# Altium PCB dc_mini_fan_controller.PcbDoc
Units mm, origin at the board's own origin, x right, y up, seen from the top; angles counter-clockwise.
Board outline 17.5 x 17.5 mm, 2 copper layers (Top Layer, Bottom Layer); 11 components, 7 nets, 37 pads, 6 vias.
Unrouted connection lines stored in the file: 1.
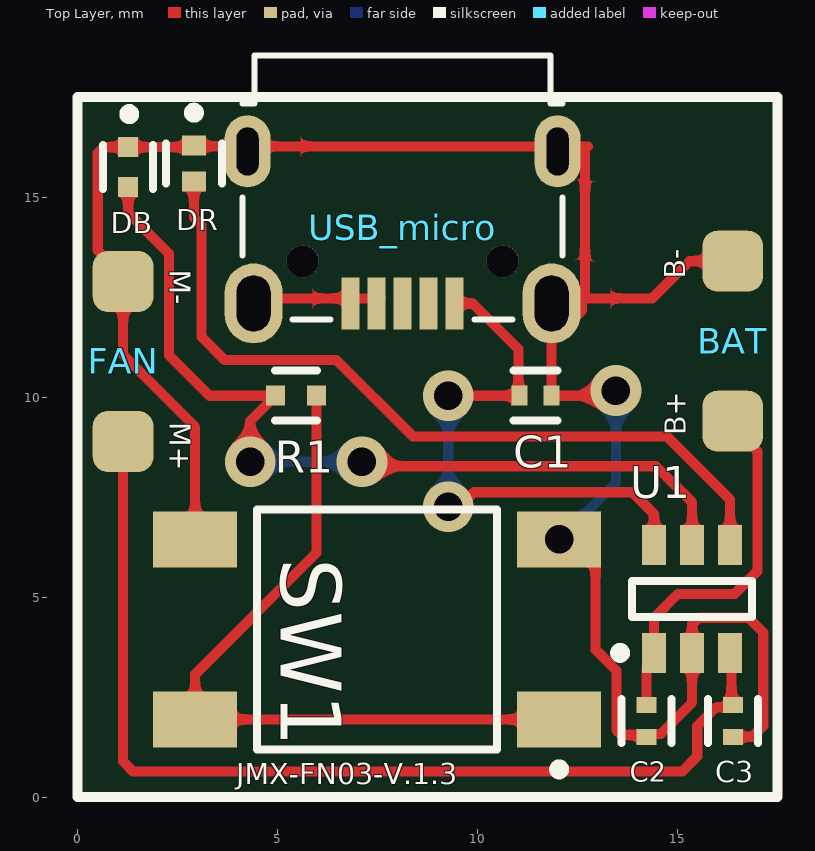
[diagram p0: Top Layer view]
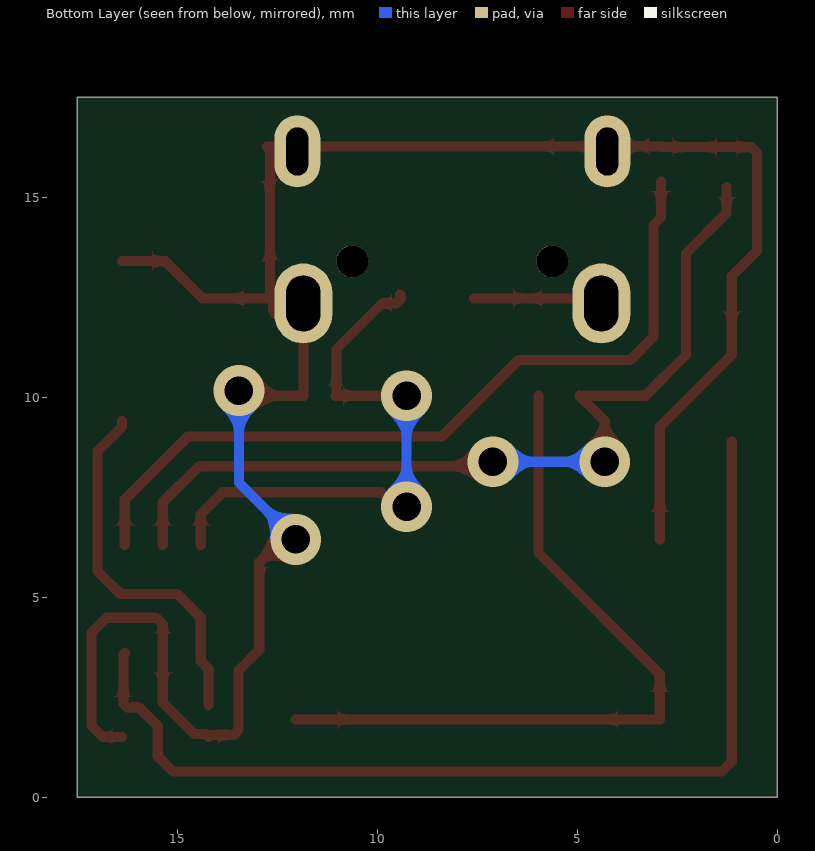
[diagram p1: Bottom Layer view, seen from below]
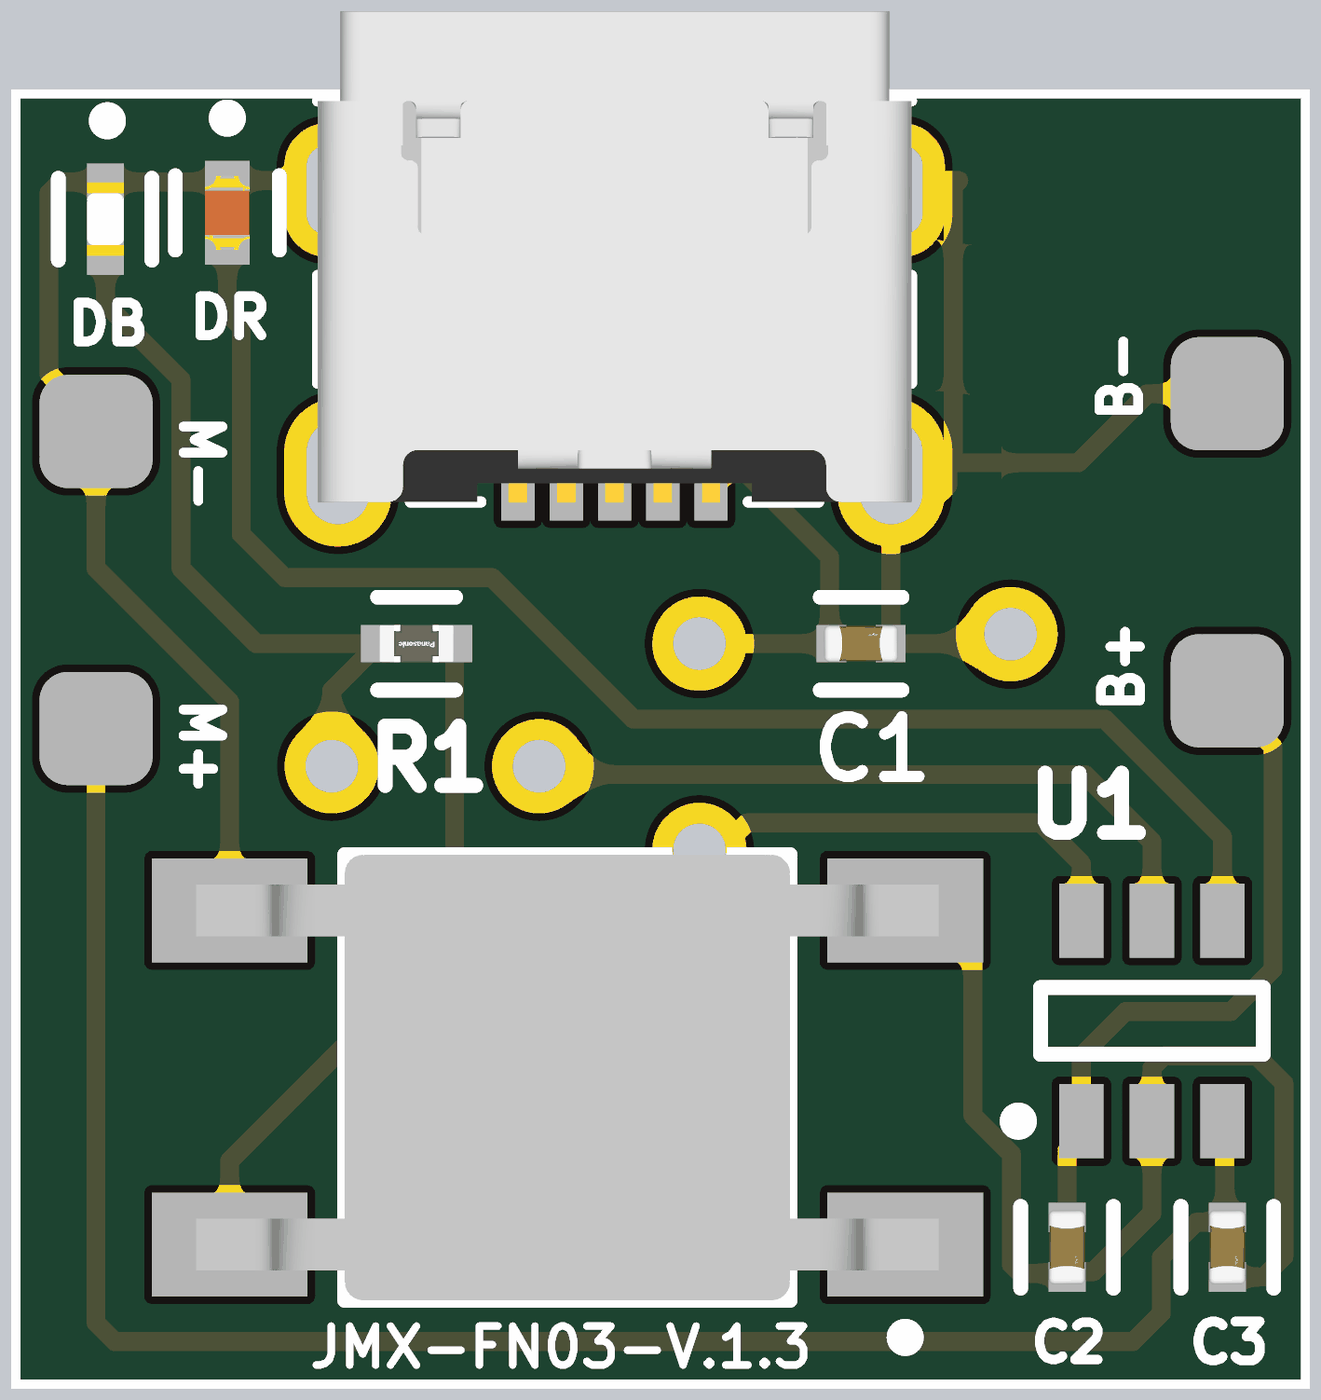
[diagram p2: 3D render of the assembled board from above, using the file's embedded part models]

## Layer stack, top to bottom
Top Solder: solder mask 0.0102, Solder Resist, Dk 3.5
Top Layer: signal copper 0.0356
Dielectric 1: dielectric 0.32, FR-4, Dk 4.8
Bottom Layer: signal copper 0.0356
Bottom Solder: solder mask 0.0102, Solder Resist, Dk 3.5

## Board outline
0,0 17.5,0 17.5,17.5 0,17.5

## Design rules (kind name [scope] priority, off if disabled: settings)
Clearance [All] p1: gap=0.254 ignorepadtopadclearanceinfootprint=FALSE except(0: Arc-Hole Track-Hole SMDPad-Hole THPad-Hole Via-Hole Fill-Hole Poly-Hole Region-Hole Text-Hole)
PolygonConnect [All] p1: connectstyle=Relief reliefconductorwidth=0.254 reliefentries=4 polygonreliefangle="90 Angle" airgapwidth=0.254
RoutingVias [All] p1: holewidth=0.711 width=1.27 viastyle="Through Hole" minholewidth=0.711 minwidth=1.27 maxholewidth=0.711 maxwidth=1.27
SolderMaskExpansion [All] p1: expansion=0.102 istentingtop=FALSE
Width [All] p1: maxlimit=0.254 minlimit=0.254 preferedwidth=0.254
30 further rules are at their usual default settings.

## Components (designator, comment, footprint, x,y, rotation, side; value= is the part's Value field where it differs from the comment)
BAT "BAT" BAT 16.383,9.398 r90 top
C1 "1uF" FP-GRM15-0_1-MFG 11.449,10.033 r0 top (schematic designator CVIN)
C2 "1uF" FP-GRM15-0_1-MFG 14.224,1.905 r270 top (schematic designator CBAT)
C3 "1uF" FP-GRM15-0_1-MFG 16.383,1.905 r270 top (schematic designator CFAN)
DB "QBLP595-IB" FP-QBLP595-IB-MFG 1.27,15.748 r270 top (schematic designator DBLUE)
DR "SML-P12VTT86R" FP-SML-P1-MFG 2.911,15.833 r270 top (schematic designator DRED)
FAN "BAT" BAT 1.143,8.89 r90 top
R1 "2K" FP-ERJ2RK-MFG 5.461,10.033 r180 top
SW1 "FSM4JSMATR" TECO-FSM4JSMATR_V 7.493,4.191 r270 top
U1 "FM5012D" FM5012D 15.367,4.953 r90 top
USB_micro "629105150521" 629105150521 8.128,15.24 r180 top

## Footprints (in the part's own frame and the unit in brackets; to place one, negate y for a bottom-side part, rotate by r counter-clockwise, add the part's x,y. Pads: shape width x height; smd on the part's side, far side on the other; paste and mask are expansions set on the pad)
629105150521 [mm] "Micro USB 2.0 SMT Type B Horizontal 5 Contacts High Current"
  rect 0.45x1.3 smd: 1(-1.3,2.9) 2(-0.65,2.9) 3(0,2.9) 4(0.65,2.9) 5(1.3,2.9)
  round 0.8 hole 0.8 unplated: MH1(-2.5,1.85) MH2(2.5,1.85)
  oval 1.15x1.8 hole 0.55 slot 1.2 at 90 deg: Shell(-3.875,-0.9) Shell(3.875,-0.9)
  oval 1.45x2 hole 0.85 slot 1.4 at 90 deg: Shell(-3.725,2.9) Shell(3.725,2.9)
  silkscreen extent -4,-3.3 4,3.3, body extent -4,-3.3 4,3.3, height 2.75
BAT [mil]
  rrect50% 60x60 smd: 1(0,0) 2(157.48,0)
FM5012D [mm] "DC mini fan controller ic"
  rect 1x0.6 smd: 1(-1.35,0.95) 2(-1.35,0) 3(-1.35,-0.95) 4(1.35,-0.95) 5(1.35,0) 6(1.35,0.95)
  silkscreen extent -1.47,-1.5 0.45,1.92, body extent -0.85,-1.5 0.85,1.5, height 1.45
FP-ERJ2RK-MFG [mm]
  rect 0.475x0.5 smd paste+0 mask+0: 1(-0.513,0) 2(0.513,0)
  silkscreen extent -0.53,-0.63 0.53,0.63, body extent -0.85,-0.38 0.85,0.38, height 0.25
FP-GRM15-0_1-MFG [mm]
  rect 0.4x0.5 smd paste+0 mask+0: 1(-0.4,0) 2(0.4,0)
  silkscreen extent -0.55,-0.63 0.55,0.63, body extent -0.7,-0.38 0.7,0.38, height 0.25
FP-QBLP595-IB-MFG [mm]
  rect 0.5x0.5 smd paste+0 mask+0: 1(-0.5,0) 2(0.5,0)
  silkscreen extent -1.45,-0.63 0.55,0.63, body extent -0.85,-0.4 0.85,0.4, height 0.25
FP-SML-P1-MFG [mm]
  rect 0.5x0.6 smd paste+0 mask+0: 1(-0.45,0) 2(0.45,0)
  silkscreen extent -1.4,-0.7 0.5,0.7, body extent -0.8,-0.43 0.8,0.43, height 0.25
TECO-FSM4JSMATR_V [mm] "SMD, 4-Leads, Body 6x6mm, Pitch 4.5mm"
  rect 1.4x2.1 smd: 1(2.25,4.55) 2(2.25,-4.55) 3(-2.25,4.55) 4(-2.25,-4.55)
  silkscreen extent -3,-3 3.62,4.68, body extent -3,-5 3,5, height 5.08

## Part data
C1 C2 C3: library part CMP-2008-04556-2, "CAP CER 1UF 10V X5R 0402", Manufacturer=Murata, Manufacturer Part Number=GRM155R61A105KE15D, Package=GRM15-0.1, Temperature="-55°C to +85°C", Temperature Characteristic=X5R, Temperature Coefficient=15%, Temperature Range High=+85°C, Temperature Range Low=-55°C, Tolerance=10%, Voltage Rating=10V, Automotive=No, Capacitance=1uF, Category=Cap, ComponentLink2Description=Datasheet, ComponentLink2URL=https://search.murata.co.jp/Ceramy/image/img/A01X/G101/ENG/GRM155R61A105KE15-01A.pdf, Device Class L1="Passive Components", Device Class L2=Capacitors, Device Class L3="Ceramic Capacitors", Digikey Description="CAP CER 1UF 10V X5R 0402", Height=0.55mm, Ipc Land Pattern Name=CAPC10050X50, Lead Free=Yes, Material=Ceramic, Mouser Description="0402 1 uF 10 V ±10% Tolerance X5R Surface Mount Multilayer Ceramic Capacitor", Octopart=https://octopart.com/grm155r61a105ke15d-murata-197442, RoHS=TRUE
DB: library part CMP-113271-000002-1, "LED BLUE CLEAR 0402 SMD", Case Code (Imperial)=0402, Case Code (Metric)=1005, Color=Blue, Forward Voltage=3.1V, Lens Color=Colorless, Test Current=20mA, Case/Package=0402, Dominant Wavelength=465nm, Height=0.6mm, Length=1mm, Lens Size=0.5mm, Lens Style=Flat, Lens Transparency=Clear, Luminous Intensity=85mcd, Mount="Surface Mount", Packaging="Tape and Reel", Viewing Angle=140°, Width=0.5mm
DR: library part CMP-08952-000002-1, "LED RED CLEAR 0402 SMD", Colour=Red, Forward Current=20mA, Forward Voltage=2V, Manufacturer=Rohm, Package=SML-P1, Power Dissipation=50mW, Reverse Voltage=5V, Temperature="-40°C to +85°C", Temperature Range High=+85°C, Temperature Range Low=-40°C, Automotive=No, Category=Diode, ComponentLink2Description=Datasheet, ComponentLink2URL=https://www.rohm.com/datasheet/SML-P12VT(R)/sml-p1-e, Device Class L1=Optoelectronics, Device Class L2=LEDs, Device Class L3=unset, Digikey Description="LED RED CLEAR 0402 SMD", Height=0.25mm, Lead Free=Yes, Led Orientation="Top View", Luminous Intensity=60mcd, Manufacturer Part Number=SML-P12VTT86R, Mouser Description="SML-P1 Series Red 0402 Clear 60 mcd 2V Surface Mount PICOLED? LED", Octopart=https://octopart.com/sml-p12vtt86r-rohm-34112315, RoHS=TRUE, Wavelength=630nm
R1: library part CMP-2002-00758-4, "RES SMD 2K OHM 1% 1/10W 0402", Case Code (Imperial)=0402, Case Code (Metric)=1005, Max Operating Temperature=155°C, Max Power Dissipation=100mW, Min Operating Temperature=-55°C, Package Quantity=10000, Resistance=2kR, Resistance Tolerance=1%, Resistor Type="Thick Film", Temperature Coefficient=100ppm/°C, Voltage Rating=50V, Case/Package=0402, Construction=Rectangular, Contact Plating=Tin, Depth=0.5mm, Features="Automotive AEC-Q200", Height=0.35mm, Lead Free="Lead Free", Length=1mm, Military Standard=Not, Mount="Surface Mount", Number of Terminations=2, Packaging="Tape and Reel", Power Rating=100mW, Radiation Hardening=No, REACH SVHC="No SVHC", RoHS Compliant=Yes, Series=ERJ, Technology="THICK FILM", Termination=SMD/SMT, Tolerance=1%, Voltage Rating (DC)=50V, Width=0.02inch, Working Voltage=50V
SW1: library part CMP-2000-07486-1, "Micro Miniature Push Button Switch FSM JSM, 50 mA, -35 to 85 degC, 4-Pin SMD, RoHS, Tape and Reel", Capacitance=0f, Case\/Package=SMD/SMT, Contact Current Rating=50mA, Contact Resistance=100mOhm, Manufacturer="TE Connectivity", Max Operating Temperature=85degC, Max Voltage Rating (DC)=12V, Min Operating Temperature=-35degC, Operating Force=160gf, Package Description="4-Pin Surface Mount Device, Body 6 x 6 mm, Pitch 4.5 mm", Package Quantity=1200, Voltage Rating (DC)=24V, Actuator Length=0.055inch, Actuator Material=Polyamide, Contact Material=CopperAlloy, Contact Plating=Silver, Current Rating=50mA, Datasheet URL=http://www.te.com/commerce/DocumentDelivery/DDEController?Action=showdoc&DocId=Customer+Drawing%7F2-1437565-7%7FV%7Fpdf%7FEnglish%7FENG_CD_2-1437565-7_V.pdf%7F4-1437565-2, Datasheet Version="Rev. V, 02/2015", Electrical Life=100000Cycles, Illumination Type=Illuminated, Manufacturer URL=http://www.te.com/, Mechanical Life=100000Cycles, Mount=SurfaceMount, Mounting Technology=SurfaceMount, Orientation=Straight, Package Reference=FSM4JSMATR, Packaging=TapeandReel, REACH SVHC=Unknown, RoHSCompliant=true, Switch Travel=0.25mm, Termination=GullWing, Throw Configuration=SPST
U1: "SOT23-6"
USB_micro: library part CMP-1502-03252-3, Contact Resistance=30mΩ, Current Rating=3A, Insulation Resistance=1GΩ, Max Operating Temperature=85°C, Min Operating Temperature=-40°C, Operating Supply Voltage=30V, Connector Type=USB, Contact Material=Gold, Contact Plating=Gold, Features=Shielded, Gender=Receptacle, Height=2.86mm, Lead Free="Lead Free", Mount="Horizontal, Surface Mount", NexarPartId=52645113, Number of Contacts=5, Number of Pins=5, Orientation=Horizontal, Packaging="Tape and Reel", REACH SVHC=Unknown, RoHS=Compliant, Termination=SMD/SMT, USB Standard="USB 2.0", Voltage Rating=30V

## Via types
v1: diameter 1.27, hole 0.711, Top Layer to Bottom Layer, 6 vias

## Nets (pads, with @x,y where several pads share a name; then routed paths per layer and width w, separated by ;. In a path a pad name is that pad's centre, name@x,y a point inside that pad or via, vN(x,y) a via of type N, cw(c..) or ccw(c..) an arc to the next point about the centre after c; other vN are vias at no path point)
GND: BAT.2 C1.2 C2.2 C3.2 DB.1 DR.1 FAN.2 SW1.3 SW1.4 U1.2 USB_micro.5 USB_micro.Shell | length 57.2
  Top Layer w0.254: SW1.4 2.943,9.249 1.143,11.049 FAN.2 1.143,13.027 0.508,13.662 0.508,16.099 0.657,16.248 DB.1 2.871,16.248 2.89,16.267 5.015,16.267 12.765,16.267 12.69,16.192 12.69,12.542 12.615,12.467 ; 5.165,12.467 7.59,12.467 ; v1(12.043,6.441) 12.381,6.441 12.954,5.868 12.954,3.683 13.474,3.163 13.474,1.673 13.593,1.554 14.175,1.554 C2.2 14.297,1.578 14.583,1.578 15.367,2.362 15.367,4.318 15.533,4.484 16.775,4.484 17.145,4.114 17.145,1.778 16.872,1.505 C3.2 ; v1(13.462,10.16) 13.335,10.033 C1.2 11.849,11.394 12.615,12.16 12.615,12.467 ; BAT.2 15.303,13.398 14.372,12.467 12.615,12.467
  Bottom Layer w0.254: v1(12.043,6.441) 13.462,7.86 v1(13.462,10.16)
NetBAT_1: BAT.1 C2.1 U1.1 | length 9.3
  Top Layer w0.254: C2.1 14.224,3.21 14.417,3.403 U1.1 14.417,4.484 15.013,5.08 16.433,5.08 16.998,5.645 16.998,8.646 16.383,9.261 BAT.1
NetCFAN_1: C3.1 FAN.1 U1.3 | length 25.7
  Top Layer w0.254: FAN.1 1.143,0.889 1.397,0.635 15.113,0.635 15.494,1.016 15.494,1.77 15.965,2.242 16.26,2.242 16.35,2.332 16.35,3.57 U1.3
NetCVIN_1: C1.1 U1.6 USB_micro.1 | length 14.3
  Top Layer w0.254: v1(9.271,7.255) 9.546,7.255 9.911,7.62 13.868,7.62 14.417,7.071 U1.6@14.417,6.304 ; v1(9.271,10.033) 10.949,10.033 C1.1 11.023,10.059 11.023,11.202 9.885,12.34 9.526,12.34 9.428,12.438 USB_micro.1@9.428,12.567
  Bottom Layer w0.254: v1(9.271,7.255) v1(9.271,10.033)
NetDBLUE_2: DB.2 R1.2 U1.5 | length 22
  Top Layer w0.254: DB.2 1.27,14.605 2.286,13.589 2.286,11.049 3.302,10.033 R1.2@4.825,10.033 ; v1(4.318,8.382) 4.318,9.403 4.825,9.91 4.838,9.91 4.948,10.021 R1.2 ; v1(7.112,8.382) 7.223,8.271 14.462,8.271 15.367,7.366 U1.5
  Bottom Layer w0.254: v1(4.318,8.382) v1(7.112,8.382)
NetDRED_2: DR.2 U1.4 | length 20
  Top Layer w0.254: DR.2 2.911,14.488 3.099,14.3 3.099,11.506 3.683,10.922 6.477,10.922 8.382,9.017 14.732,9.017 16.317,7.432 U1.4
NetR1_1: R1.1 SW1.1 SW1.2 | length 18.4
  Top Layer w0.254: R1.1 5.974,6.101 2.943,3.07 SW1.2 3.293,1.941 SW1.1
pads on no net: USB_micro.2 USB_micro.3 USB_micro.4 USB_micro.MH1 USB_micro.MH2

## Silkscreen, mask and mechanical layers (free items; w line width, h text height)
Top Overlay:
  the board outline again, w0.254
  text "M-" at 2.313,13.181 h0.52 r270
  text "B-" at 15.19,12.951 h0.52 r90
  text "M+" at 2.313,9.371 h0.52 r270
  text "B+" at 15.213,9.044 h0.52 r90
  text "JMX-FN03-V.1.3" at 3.971,0.315 h0.52

## Text inside footprints (layer, text, board x,y; h text height)
USB_micro: Mechanical 2 "PCB Edge" at 9.428,18.54 h0.41 r180